# EAGLE board IO4-LEDStripDriver (EAGLE 7.7.0)
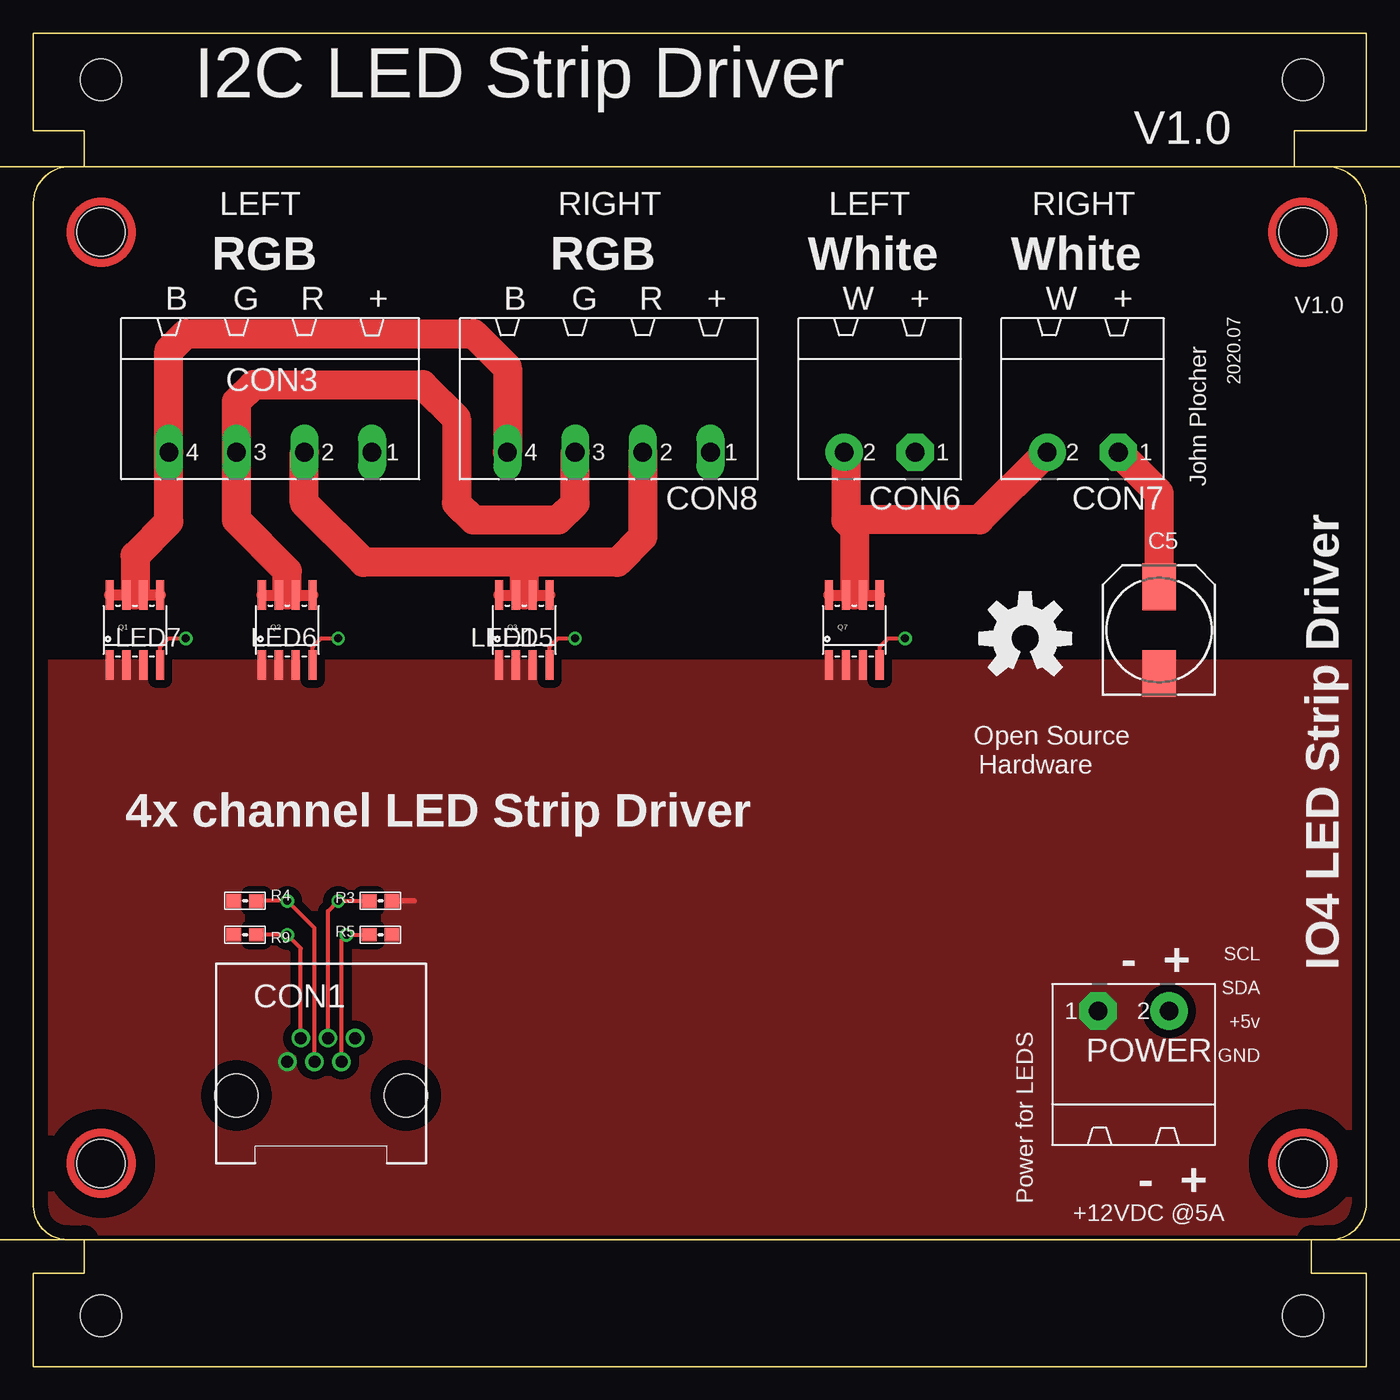
[diagram p0: board, top side]
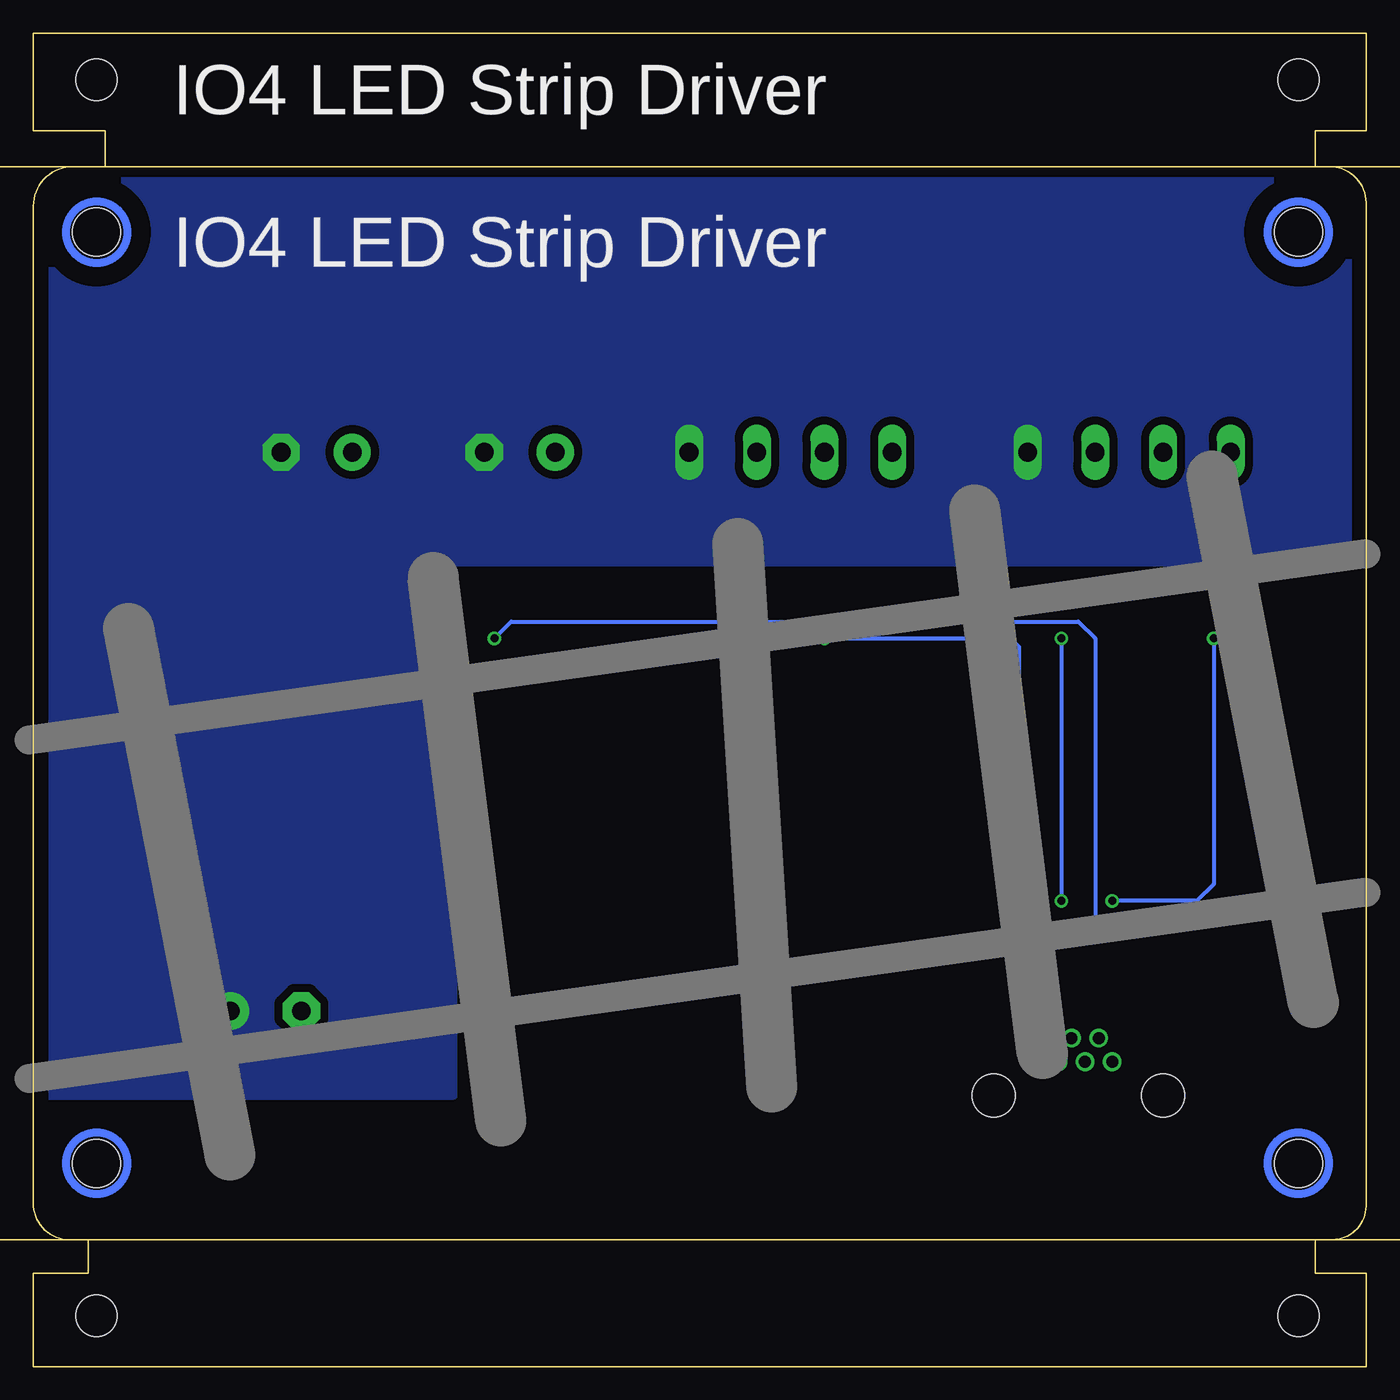
[diagram p1: board, bottom side, seen from below]

Size 100.01 x 100 mm. Coordinates in mm from the lower left corner, seen from the top.
Copper layers (1*16): Top 0.035mm / dielectric 1.5mm / Bottom 0.035mm
Design rules "default": minimum track width 10mil, minimum drill 0.6mm, track to track 8mil, track to pad 8mil, pad to pad 8mil, via to via 8mil, smd to smd 8mil, copper to edge 40mil, drill to drill 8mil, minimum pad ring 10mil, minimum via ring 8mil, stop-mask expansion 4mil, vias tented up to drill 0mil, thermal gap 10mil
Net classes: 0 default: width 0.254 mm, drill 0.5 mm, clearance 0.203 mm; 1 Power: width 0.406 mm, drill 0.6 mm, clearance 0.203 mm; 2 signals: width 0.305 mm, drill 0.6 mm, clearance 0.203 mm; 3 Feed: width 1.016 mm, drill 1.4 mm, clearance 0.203 mm

## Footprints (pad centres in the part's own frame; a part is rotated, then mirrored left to right if it is on the bottom)
BOARD-10X8-TEMPLATE = hole 3.1: 5.08,96.52; 95.25,96.52; 5.08,3.81; 95.25,3.81
0810-CAP = smd 3.5 x 2.5: + 3.25,0; - -3.25,0
RJ25-INVERTED = drill 0.9 pad 1.4: 1 2.54,4.318; 2 1.524,2.54; 3 0.508,4.318; 4 -0.508,2.54; 5 -1.524,4.318; 6 -2.54,2.54 | hole 3.251: -6.35,0; 6.35,0
MSTBA4 = drill 1.397 long: 1 -7.62,5.08; 2 -2.54,5.08; 3 2.54,5.08; 4 7.62,5.08
MSTBA2 = drill 1.397 pad 2.794 octagon: 1 -2.667,5.08 | drill 1.397 pad 2.794: 2 2.667,5.08
SO08 = smd 0.61 x 2.21: 1 -1.905,-2.616; 2 -0.635,-2.616; 3 0.635,-2.616; 4 1.905,-2.616; 5 1.905,2.616; 6 0.635,2.616; 7 -0.635,2.616; 8 -1.905,2.616
0603-RES = smd 1.1 x 1: 1 -0.85,0; 2 0.85,0
MOUNTINGHOLE = hole 3.6: 0,0

## Placement (x,y rotation side)
BOARD1  BOARD80X100-TEMPLATE  [BOARD-10X8-TEMPLATE]  0.01,0 0 top
C5  150uF  [0810-CAP]  84.46,55.24 90 top
CON1  [RJ25-INVERTED]  21.6,20.32 0 top
CON3  [MSTBA4]  17.79,73.66 180 top
CON6  [MSTBA2]  63.51,73.66 180 top
CON7  [MSTBA2]  78.75,73.66 180 top
CON8  [MSTBA4]  43.19,73.66 180 top
OSHW1  OSHW-LOGOL  [OSHW-LOGO-L]  74.43,54.61 0 top
POWER  [MSTBA2]  82.56,21.59 0 top
Q1  DMN4468  [SO08]  7.63,55.24 0 top
Q2  DMN4468  [SO08]  19.06,55.24 0 top
Q3  DMN4468  [SO08]  36.84,55.24 0 top
Q7  DMN4468  [SO08]  61.6,55.24 0 top
R3  10k  [0603-RES]  26.04,34.92 180 top
R4  10k  [0603-RES]  15.88,34.92 0 top
R5  10k  [0603-RES]  26.04,32.38 180 top
R9  10k  [0603-RES]  15.88,32.38 0 top
U$1  MOUNTINGHOLE  [MOUNTINGHOLE]  5.09,15.24 0 top
U$2  MOUNTINGHOLE  [MOUNTINGHOLE]  95.26,15.24 0 top
U$3  MOUNTINGHOLE  [MOUNTINGHOLE]  5.09,85.09 0 top
U$4  MOUNTINGHOLE  [MOUNTINGHOLE]  95.26,85.09 0 top

## Library data of the parts
BOARD1 C5 CON1 CON3 CON6-CON8 POWER Q1-Q3 Q7 R3-R5 R9 U$1-U$4 = SPCoast
OSHW1 = SparkFun

## Nets
1: CON1.1
+12V [Feed]: C5.+ CON3.1 CON6.1 CON7.1 CON8.1 POWER.2
B: CON3.4 CON8.4 Q1.5 Q1.6 Q1.7 Q1.8
BLED: CON1.4 Q1.4 R4.2
G: CON3.3 CON8.3 Q2.5 Q2.6 Q2.7 Q2.8
GLED: CON1.3 Q2.4 R3.2
GND: C5.- CON1.6 POWER.1 Q1.1 Q1.2 Q1.3 Q2.1 Q2.2 Q2.3 Q3.1 Q3.2 Q3.3 Q7.1 Q7.2 Q7.3 R3.1 R4.1 R5.1 R9.1
R: CON3.2 CON8.2 Q3.5 Q3.6 Q3.7 Q3.8
RLED: CON1.2 Q3.4 R5.2
W: CON6.2 CON7.2 Q7.5 Q7.6 Q7.7 Q7.8
WLED: CON1.5 Q7.4 R9.2

## Tracks (layer width: path | path; a pad name or v marks a point on that pad's centre or on a via)
+12V
  Top 2.184: CON7.1 84.46,65.53 C5.+
  pour Bottom (isolate 0.61, rank 2, no thermals): 68.46,20.32 68.46,49.02 68.59,52.07 68.59,60.33 0.01,60.33 0.01,88.9 99.07,88.9 99.07,20.32
B
  Top 0.813: Q1.5 Q1.6 | Q1.8 Q1.7 7.63,57.86 Q1.6 | 8.77,57.86 Q1.6
  Top 2.184: CON8.4 35.57,74.93 33.03,77.47 11.44,77.47 10.17,76.2 CON3.4 10.17,63.37 7.63,60.83 7.63,57.86
BLED  (via drill 0.6)
  Top 0.305: CON1.4 21.09,32.89 v19.06,34.92 R4.2 | Q1.4 9.53,53.98 10.17,54.61 v11.44,54.61
  Bottom 0.305: v11.44,54.61 11.44,36.2 12.71,34.92 v19.06,34.92
G
  Top 0.61: Q2.7 19.06,57.86 Q2.6
  Top 0.813: Q2.8 Q2.7 | Q2.6 Q2.5
  Top 2.184: 19.06,57.86 19.06,59.69 15.25,63.5 CON3.3 15.25,72.39 16.52,73.66 29.22,73.66 31.76,71.12 31.76,64.77 33.03,63.5 39.38,63.5 40.65,64.77 CON8.3
GLED  (via drill 0.6)
  Top 0.305: CON1.3 22.11,34.16 v22.87,34.92 R3.2 | Q2.4 20.96,53.98 21.6,54.61 v22.87,54.61
  Bottom 0.305: v22.87,54.61 v22.87,34.92
GND
  Top 0.406: R3.1 28.58,34.92
  pour Top (isolate 0.61, no thermals): 100.34,52.7 0.01,52.7 0.01,10.16 100.34,10.16
R
  Top 0.813: Q3.8 Q3.7 36.84,57.86 Q3.6 Q3.5
  Top 2.184: CON3.2 20.33,64.77 24.77,60.33 36.84,60.33 | CON8.2 45.73,62.23 43.82,60.33 36.84,60.33 | 36.84,60.33 36.84,57.86
RLED  (via drill 0.6)
  Top 0.305: CON1.2 23.12,32 v23.5,32.38 R5.2 | Q3.4 38.74,53.98 39.38,54.61 v40.65,54.61
  Bottom 0.305: v40.65,54.61 26.68,54.61 26.04,53.98 26.04,34.92 v23.5,32.38
W
  Top 0.813: Q7.8 Q7.7 61.6,57.86 Q7.6 Q7.5
  Top 2.184: CON6.2 60.97,68.45 60.97,63.5 | CON7.2 71,63.5 60.97,63.5 | 60.97,63.5 61.6,62.87 61.6,57.86
WLED  (via drill 0.6)
  Top 0.305: CON1.5 20.07,31.37 v19.06,32.38 R9.2 | Q7.4 63.51,53.98 64.14,54.61 v65.41,54.61
  Bottom 0.305: v65.41,54.61 64.14,55.88 21.6,55.88 20.33,54.61 20.33,33.66 v19.06,32.38

## Text on the board
tPlace: I2C LED Strip Driver | V1.0 | LEFT | RIGHT | LEFT | RIGHT | RGB | RGB | White | White | B | G | R | + | B | G | R | + | W | + | W | + | V1.0 | 2020.07 | John Plocher | LED7 | LED6 | LED1 | LED5 | Open Source | Hardware | 4x channel LED Strip Driver | - + | SCL | IO4 LED Strip Driver | SDA | +5v | GND | - + | Power for LEDS | +12VDC @5A
bPlace: IO4 LED Strip Driver | IO4 LED Strip Driver
bDocu: 4x channels: RGB + White / Two connectors for driving Left and Right strings / Each string can be up to 2.5m | Model Railroading / is fun! | Go Bears! | Made in the PCR, Coast Division, NMRA | www. SP Coast .com